# Altium PCB Second_PCB.PcbDoc
Units mm, origin at the board's own origin, x right, y up, seen from the top; angles counter-clockwise.
Board outline 229.74 x 79.88 mm, 2 copper layers (Top Layer, Bottom Layer); 25 components, 20 nets, 77 pads, 0 vias.
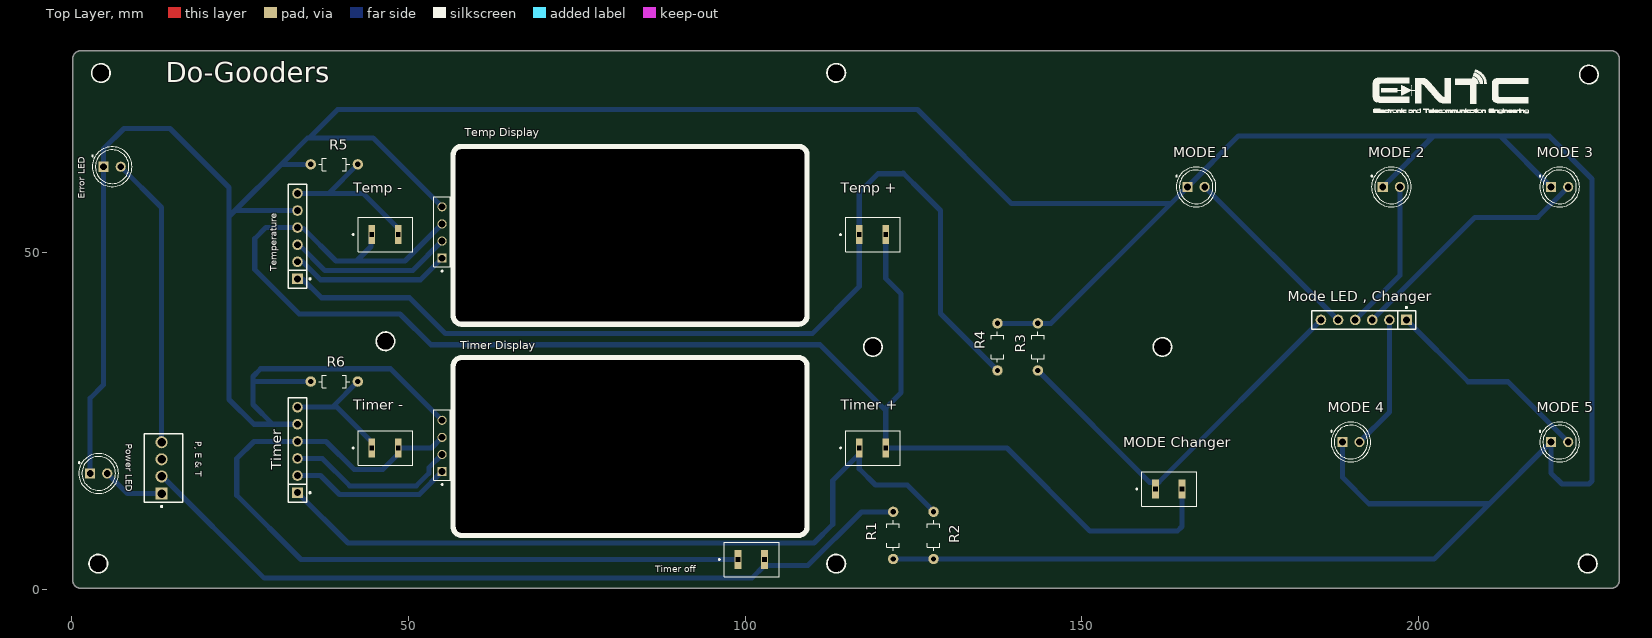
[diagram p0: Top Layer view]
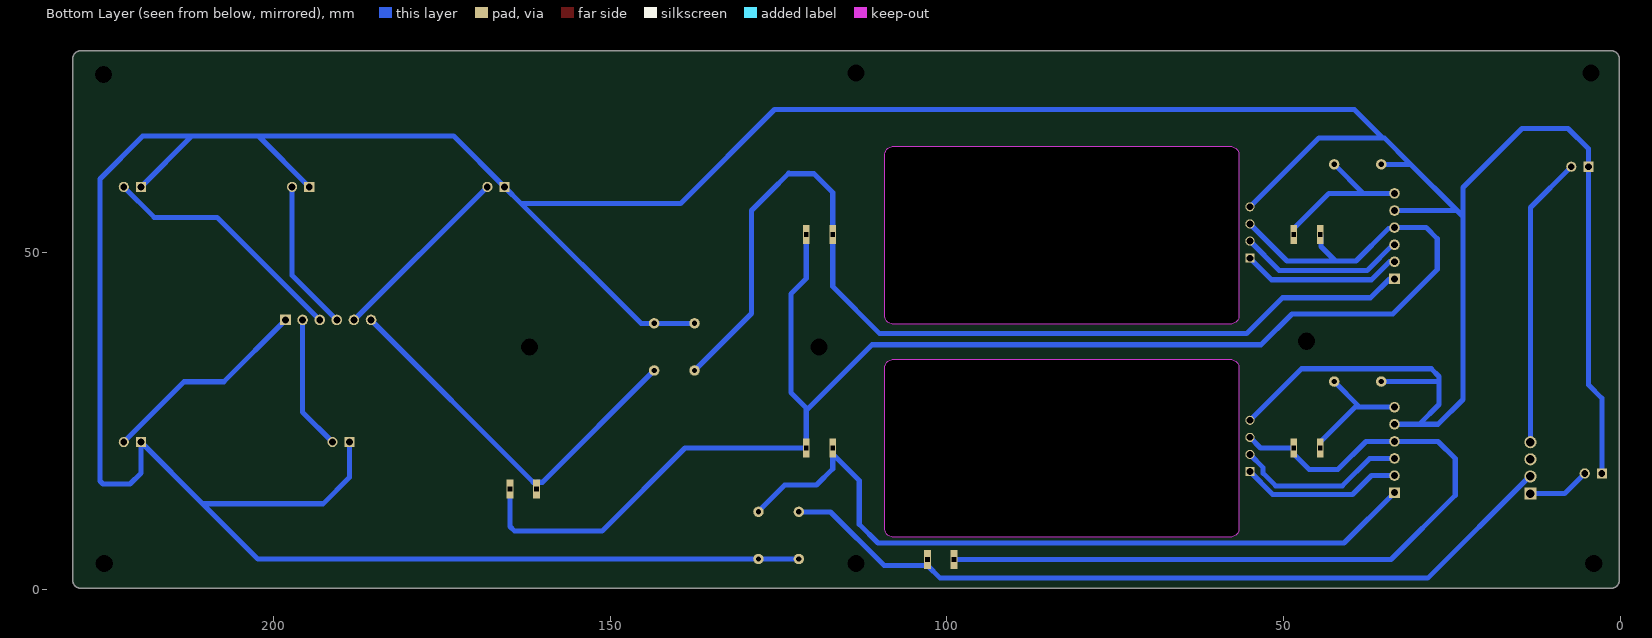
[diagram p1: Bottom Layer view, seen from below]
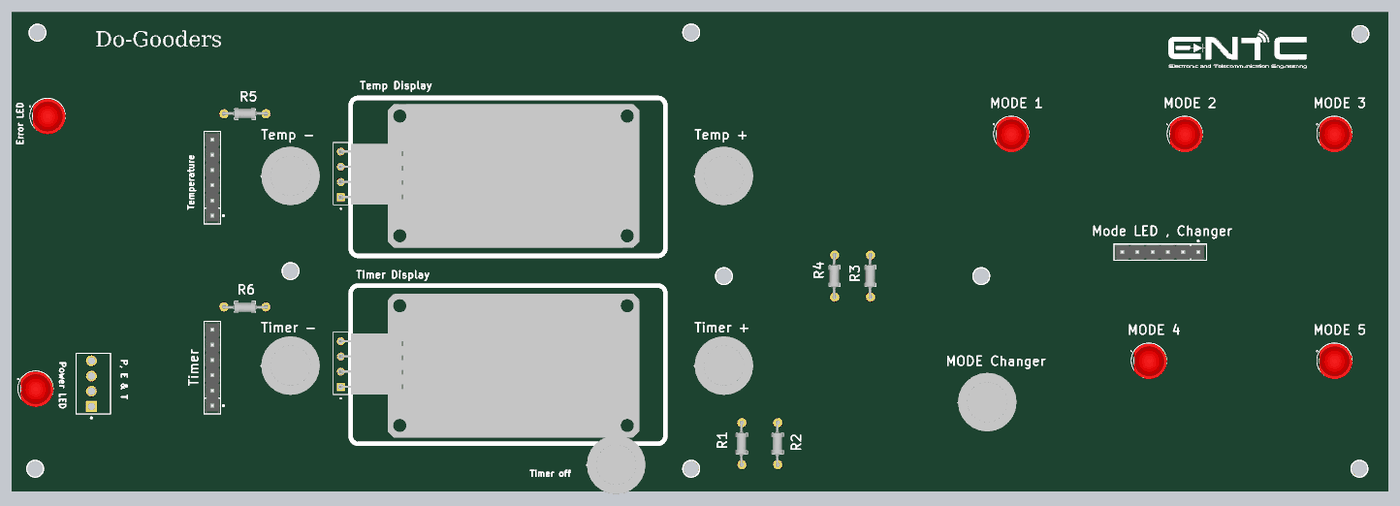
[diagram p2: 3D render of the assembled board from above, using the file's embedded part models]

## Layer stack, top to bottom
Top Solder: solder mask 0.0102, Solder Resist, Dk 3.5
Top Layer: signal copper 0.0356
Dielectric 1: dielectric 0.32, FR-4, Dk 4.8
Bottom Layer: signal copper 0.0356
Bottom Solder: solder mask 0.0102, Solder Resist, Dk 3.5

## Board outline
0.127,1.397 0.127,78.74 cw(c1.397,78.74) 1.397,80.01 228.6,80.01 cw(c228.6,78.74) 229.87,78.74 229.87,1.397 cw(c228.6,1.397) 228.6,0.127 1.397,0.127 cw(c1.397,1.397)
cut-out: 56.642,9.017 ccw(c57.912,9.017) 57.912,7.747 107.95,7.747 ccw(c107.95,9.017) 109.22,9.017 109.22,32.893 ccw(c107.95,32.893) 107.95,34.163 57.912,34.163 ccw(c57.912,32.893) 56.642,32.893
cut-out: 56.642,40.64 ccw(c57.912,40.64) 57.912,39.37 107.95,39.37 ccw(c107.95,40.64) 109.22,40.64 109.22,64.516 ccw(c107.95,64.516) 107.95,65.786 57.912,65.786 ccw(c57.912,64.516) 56.642,64.516

## Design rules (kind name [scope] priority, off if disabled: settings)
Clearance [All] p1: gap=0.254 ignorepadtopadclearanceinfootprint=FALSE except(0: Arc-Hole Track-Hole SMDPad-Hole THPad-Hole Via-Hole Fill-Hole Poly-Hole Region-Hole Text-Hole)
PolygonConnect [All] p1: connectstyle=Relief reliefconductorwidth=0.254 reliefentries=4 polygonreliefangle="90 Angle" airgapwidth=0.254
RoutingVias [All] p1: holewidth=0.711 width=1.27 viastyle="Through Hole" minholewidth=0.711 minwidth=1.27 maxholewidth=0.711 maxwidth=1.27
SolderMaskExpansion [All] p1: expansion=0.102 istentingtop=FALSE
Width [All] p1: maxlimit=0.762 minlimit=0.762 preferedwidth=0.762 minimp=50.000000 maximp=50.000000 favimp=50.000000
30 further rules are at their usual default settings.

## Components (designator, comment, footprint, x,y, rotation, side; value= is the part's Value field where it differs from the comment)
"Error LED" "WP7113SEC/J3" LED_WP7113SEC/J3 6,62.77 r0 top
"MODE 1" "WP7113SEC/J3" LED_WP7113SEC/J3 167,59.77 r0 top
"MODE 2" "WP7113SEC/J3" LED_WP7113SEC/J3 196,59.77 r0 top
"MODE 3" "WP7113SEC/J3" LED_WP7113SEC/J3 221,59.77 r0 top
"MODE 4" "WP7113SEC/J3" LED_WP7113SEC/J3 190,21.87 r0 top
"MODE 5" "WP7113SEC/J3" LED_WP7113SEC/J3 221,21.87 r0 top
"MODE Changer" "800AWSP9M2QE" SW_800AWSP9M2QE 163,14.89 r0 top
"Mode LED , Changer" "22-28-4060" FP-22-28-4060-MFG 191.897,40.005 r180 top
"P, E & T" "640456-4" TECO-640456-4 13.335,18.034 r270 top (schematic designator "Power, Error & Timer off")
"Power LED" "WP7113SEC/J3" LED_WP7113SEC/J3 4,17.21 r0 top
R1 "1623928-4" RESAD700W45L350D185 122,8 r90 top (schematic designator "Timer Off R")
R2 "1623928-4" RESAD700W45L350D185 128,8 r90 top (schematic designator "Timer + R")
R3 "1623928-4" RESAD700W45L350D185 143.5,36 r90 top (schematic designator "MODE R")
R4 "1623928-4" RESAD700W45L350D185 137.5,36 r90 top (schematic designator "Temp + R")
R5 "1623928-4" RESAD700W45L350D185 38.989,63.119 r0 top (schematic designator "Temp - R")
R6 "1623928-4" RESAD700W45L350D185 38.989,30.861 r180 top (schematic designator "Timer - R")
"Temp +" "800AWSP9M2QE" SW_800AWSP9M2QE 119,52.69 r0 top
"Temp -" "800AWSP9M2QE" SW_800AWSP9M2QE 46.6,52.69 r0 top
"Temp Display" "2-826926-0" TE_2-826926-0 55,49.187 r90 top
Temperature "22-28-4060" FP-22-28-4060-MFG 33.528,52.451 r90 top
Timer "22-28-4060" FP-22-28-4060-MFG 33.528,20.701 r90 top
"Timer +" "800AWSP9M2QE" SW_800AWSP9M2QE 119,20.99 r0 top
"Timer -" "800AWSP9M2QE" SW_800AWSP9M2QE 46.6,20.99 r0 top
"Timer Display" "2-826926-0" TE_2-826926-0 55,17.487 r90 top
"Timer off" "800AWSP9M2QE" SW_800AWSP9M2QE 101,4.43 r0 top

## Footprints (in the part's own frame and the unit in brackets; to place one, negate y for a bottom-side part, rotate by r counter-clockwise, add the part's x,y. Pads: shape width x height; smd on the part's side, far side on the other; paste and mask are expansions set on the pad)
FP-22-28-4060-MFG [mm]
  rect 1.57x1.57 hole 1.02 paste-1000 mask+0: 1(-6.35,0)
  round 1.57 hole 1.02 paste-1000 mask+0: 2(-3.81,0) 3(-1.27,0) 4(1.27,0) 5(3.81,0) 6(6.35,0)
  silkscreen extent -7.75,-1.97 7.75,1.37, body extent -7.85,-1.47 7.85,1.47, height 0.25
LED_WP7113SEC/J3 [mm]
  round 1.508 hole 1: A(1.27,0)
  rect 1.508x1.508 hole 1: C(-1.27,0)
  silkscreen extent -3.03,-2.95 2.95,2.95, body extent -2.46,-3.05 2.97,2.85, height 19.76
RESAD700W45L350D185 [mm]
  round 1.558 hole 0.8: 1(-3.5,0) 2(3.5,0)
  silkscreen extent -2.29,-0.92 2.29,0.92, body extent -3.75,-0.92 3.75,1.08, height 0.99
SW_800AWSP9M2QE [mil]
  rect 40x110 hole 25 square: 1(-80,0) 3(75,0)
  silkscreen extent -193,-100 160,100, body extent -193,-191 193,195, height 815
TE_2-826926-0 [mm]
  rect 1.35x1.35 hole 1: 1(0,0)
  round 1.35 hole 1: 2(2.54,0) 3(5.08,0) 4(7.62,0)
  silkscreen extent -2.02,-1.25 9.14,1.25, body extent -8.44,-49.85 15.56,0.25, height 7.56
TECO-640456-4 [mm] "Through Hole, 4-Leads, Body 10.16x5.72mm, Pitch 2.54mm"
  rect 1.8x1.8 hole 1.27 paste+0: 1(3.81,0)
  round 1.8 hole 1.27 paste+0: 2(1.27,0) 3(-1.27,0) 4(-3.81,0)
  silkscreen extent -5.08,-2.54 5.86,3.18, body extent -5.08,-2.54 5.08,3.18, height 10.03

## Part data
"Error LED" "MODE 1" "MODE 2" "MODE 3" "MODE 4" "MODE 5" "Power LED": "Red 625nm LED Indication - Discrete 2.2V Radial", Package="Radial Kingbright", Availability=Unavailable, MF=Kingbright, MP=WP7113SEC/J3, Price=None, SnapEDA_Link=https://www.snapeda.com/parts/WP7113SEC/J3/Kingbright/view-part/826989/?ref=snap
"MODE Changer" "Temp +" "Temp -" "Timer +" "Timer -" "Timer off": "Pushbutton Switch SPST-NO Standard Through Hole", Package=None, Availability="In Stock", Check_prices=https://www.snapeda.com/parts/800AWSP9M2QE/E-Switch/view-part/?ref=eda, MF=E-Switch, MP=800AWSP9M2QE, Price=None, Purchase-URL=https://pricing.snapeda.com/search/part/800AWSP9M2QE/?ref=eda, SnapEDA_Link=https://www.snapeda.com/parts/800AWSP9M2QE/E-Switch/view-part/?ref=snap
"Mode LED , Changer" Temperature Timer: library part CMP-04776-000763-1, "CONN HEADER VERT 6POS 2.54MM", Color=Black, Contact Resistance=20mR, Current Rating=4A, Max Operating Temperature=75°C, Max Voltage Rating (AC)=250V, Max Voltage Rating (DC)=250.25kV, Min Operating Temperature=0°C, Package Quantity=1, Connector Type="Male Pin", Contact Material=Brass, Contact Mating Length=0.24inch, Contact Plating=Tin, Contact Type="Male Pin", Depth=2.49mm, Gender=Male, Housing Color=Black, Housing Material=Thermoplastic, Length=15.24mm, Mount="Through Hole", Number of Contacts=6, Number of Positions=6, Number of Rows=1, Orientation=Straight, Packaging=Bulk, Pitch=2.54mm, RoHS Compliant=Yes, Series="KK® 42375", Termination=Solder, Voltage Rating=250V
"P, E & T": library part CMP-2000-05419-1, "Male Header, Pitch 2.54 mm, 1 x 4 Position, Height 10.03 mm, Tail Length 3.56 mm, RoHS, Bulk", Color=White, Current, Rating="5 /  / A", Flammability Rating=UL94V-0, Manufacturer="TE Connectivity", Temperature, Operating="-55to+105 /  / degC", Voltage, Rating="250 /  / V", Agency Approvals=CSA,UL, Angle=Straight, Brand/Series=MTA-100Series, Color, Housing=White, Connector Type=MTA-100, Contact Centerline Spacing="0.100 /  / in.", Contact Mating Area Plating=Tin, Contact Plating=Tin, Contact Shape=Square, Contact Termination Area Plating=Tin, Datasheet URL=https://datasheet.ciiva.com/16286/eng-ds-82056-mta-0608-16286228.pdf, Datasheet Version=Dec-14, Length, Overall="0.4 /  / \"", Length, Pin="0.14 /  / \"", Length, Terminal Post="0.14 /  / in.", Manufacturer URL=http://www.te.com/, Material, Contact=CopperAlloy, Material, Housing=Polyester, Mount Angle=Vertical, Mounting Hole Size="0.04 /  / \"", Mounting Type=PCMount, Number of Contacts=4, Number of Positions=4, Number of Rows=1, Pin Spacing="0.1 /  / \"", Primary Type=InterconnectSystem, Size, Post="0.025 /  / in.", Special Features=Pinstrip, Standards=RoHSCompliant,ELVCompliant,UL94V-0, Termination=Solder, Type=PCBPlug
R1 R2 R3 R4 R5 R6: "CFR16 5% 10K", Package=None, Availability=Unavailable, MP=1623928-4, Price=None
"Temp Display" "Timer Display": "20P AMPMODU II PIN HDR", Package=None, Availability=Warning, Centerline_Pitch="2.54 mm[.1 in]", EU_RoHS_Compliance=Compliant, MF="TE Connectivity", MP=2-826926-0, Number_of_Positions=20, Price=None, Product_Type=Connector, SnapEDA_Link=https://www.snapeda.com/parts/2-826926-0/TE%20Connectivity%20AMP%20Connectors/view-part/1399270/?ref=snap

## Free pads (board coordinates)
  round 1.524 hole 2.54: 2(3.937,3.81) 2(4.318,76.685) 2(46.6,36.84) 2(113.538,3.81) 2(113.538,76.685) 2(119,36) 2(162,36) 2(225.171,3.81) 2(225.298,76.454)

## Nets (pads, with @x,y where several pads share a name; then routed paths per layer and width w, separated by ;. In a path a pad name is that pad's centre, name@x,y a point inside that pad or via, vN(x,y) a via of type N, cw(c..) or ccw(c..) an arc to the next point about the centre after c; other vN are vias at no path point)
GND: "Error LED.C" "MODE 1.C" "MODE 2.C" "MODE 3.C" "MODE 4.C" "MODE 5.C" "Power LED.C" "Temp Display.4" "Timer Display.4" R1.1 R2.1 R3.2 R4.2 R5.1 R6.2 Temperature.5 Timer.5 | length 668
  Bottom Layer w0.762: 2.73,17.21 2.73,28.384 4.73,30.384 4.73,62.77 4.73,65.436 7.747,68.453 14.605,68.453 23.368,59.69 23.368,55.372 ; Timer.5 29.845,24.511 ; Temperature.5 24.257,56.261 ; R6.2 27.051,30.861 26.924,30.734 ; R5.1 31.242,63.119 31.178,63.182 ; 55,25.107 47.341,32.766 28.067,32.766 26.924,31.623 26.924,30.734 ; 55,56.807 44.751,67.056 35.306,67.056 ; R1.1 R2.1 202.36,4.5 210.56,12.7 ; R4.2 R3.2 145.46,39.5 163.237,57.277 ; 188.73,21.87 188.73,16.629 192.659,12.7 210.56,12.7 ; 194.73,59.77 202.27,67.31 ; 219.73,59.77 212.19,67.31 ; 23.368,55.372 24.257,56.261 ; 23.368,55.372 23.368,28.194 27.051,24.511 29.845,24.511 ; 24.257,56.261 31.178,63.182 ; 26.924,30.734 26.924,27.432 29.845,24.511 ; 31.178,63.182 35.052,67.056 35.306,67.056 ; 35.306,67.056 39.497,71.247 125.603,71.247 139.573,57.277 163.237,57.277 ; 163.237,57.277 165.73,59.77 173.27,67.31 202.27,67.31 ; 202.27,67.31 212.19,67.31 ; 210.56,12.7 219.73,21.87 219.73,17.252 221.361,15.621 225.36,15.621 225.806,16.067 225.806,60.96 219.456,67.31 212.19,67.31
"NetError LED_A": "Error LED.A" "P, E & T.4" | length 43.4
  Bottom Layer w0.762: 7.27,62.77 13.335,56.705 13.335,21.844
"NetMODE 1_A": "MODE 1.A" "Mode LED , Changer.5" | length 28
  Bottom Layer w0.762: 168.27,59.77 168.296,59.77 188.061,40.005 188.087,40.005
"NetMODE 2_A": "MODE 2.A" "Mode LED , Changer.4" | length 22.5
  Bottom Layer w0.762: 190.627,40.005 197.27,46.648 197.27,59.77
"NetMODE 3_A": "MODE 3.A" "Mode LED , Changer.3" | length 37.3
  Bottom Layer w0.762: 193.167,40.005 208.407,55.245 217.745,55.245 222.27,59.77
"NetMODE 4_A": "MODE 4.A" "Mode LED , Changer.2" | length 20
  Bottom Layer w0.762: 191.27,21.87 195.707,26.307 195.707,40.005
"NetMODE 5_A": "MODE 5.A" "Mode LED , Changer.1" | length 31.5
  Bottom Layer w0.762: 198.247,40.005 207.428,30.824 213.316,30.824 222.27,21.87
"NetMODE Changer_1": "MODE Changer.1" "Mode LED , Changer.6" R3.1 | length 59.4
  Bottom Layer w0.762: R3.1 160.094,15.906 160.841,15.906 160.968,15.779 160.968,14.89 ; 161.448,15.906 185.547,40.005
"NetPower LED_A": "P, E & T.1" "Power LED.A" | length 9.3
  Bottom Layer w0.762: 5.27,17.21 8.256,14.224 13.335,14.224
"NetPower, Error & Timer off_2": "P, E & T.2" "Timer off.3" R1.2 | length 119.9
  Bottom Layer w0.762: 13.335,16.764 13.493,16.764 28.606,1.651 101.015,1.651 102.905,3.541 ; 102.905,4.43 102.905,3.541 ; R1.2 117.291,11.5 109.332,3.541 102.905,3.541
"NetTemp + R_1": "Temp +.1" R4.1 Temperature.1 | length 146.5
  Bottom Layer w0.762: Temperature.1 34.29,46.101 37.084,43.307 50.165,43.307 55.499,37.973 109.982,37.973 116.968,44.959 116.968,52.69 116.968,58.929 119.761,61.722 123.444,61.722 123.509,61.787 126.365,58.932 126.365,58.928 129.032,56.261 129.032,40.968 R4.1
"NetTemp - R_2": "Temp -.3" R5.2 Temperature.6 | length 24.1
  Bottom Layer w0.762: Temperature.6 38.171,58.801 ; R5.2 38.171,58.801 ; 48.505,52.69 48.505,53.579 43.283,58.801 38.171,58.801
"NetTemp Display_1": "Temp Display.1" Temperature.2 | length 23.9
  Bottom Layer w0.762: Temperature.2 34.29,48.641 36.957,45.974 51.787,45.974 55,49.187
"NetTemp Display_2": "Temp Display.2" Temperature.3 | length 24.8
  Bottom Layer w0.762: Temperature.3@33.655,51.308 37.592,47.371 50.644,47.371 55,51.727
"NetTimer + R_2": "Timer +.1" R2.2 Timer.1 | length 112.2
  Bottom Layer w0.762: Timer.1 41.021,6.858 110.236,6.858 113.03,9.652 113.03,16.163 116.968,20.101 ; 116.968,20.99 116.968,20.101 ; R2.2@127.717,11.882 124.105,15.494 119.38,15.494 116.968,17.906 116.968,20.101
"NetTimer - R_1": "Timer -.1" R6.1 Timer.6 | length 19.5
  Bottom Layer w0.762: Timer.6 38.679,27.051 ; R6.1 38.679,27.051 ; 44.568,20.99 44.568,21.879 39.396,27.051 38.679,27.051
"NetTimer Display_1": "Timer Display.1" Timer.2 | length 24
  Bottom Layer w0.762: Timer.2 36.957,16.891 39.751,14.097 51.61,14.097 55,17.487
"NetTimer Display_2": "Timer Display.2" Timer.3 | length 25.6
  Bottom Layer w0.762: Timer.3 37.211,19.431 41.275,15.367 51.181,15.367 53.034,17.22 53.034,18.061 55,20.027
Vcc: "MODE Changer.3" "Temp +.3" "Temp -.1" "Temp Display.3" "Timer +.3" Temperature.4 | length 233.2
  Bottom Layer w0.762: 44.568,52.69 44.441,52.563 44.441,50.918 42.291,48.768 ; 55,54.267 49.501,48.768 42.291,48.768 ; 120.905,52.69 120.905,46.153 123.19,43.868 123.19,29.21 120.905,26.925 120.905,26.542 ; 164.905,14.89 164.905,9.33 164.211,8.636 151.257,8.636 138.903,20.99 120.905,20.99 120.905,26.542 ; 42.291,48.768 39.243,48.768 34.445,53.566 33.683,53.566 Temperature.4 28.829,53.721 27.178,52.07 27.178,47.498 33.782,40.894 48.768,40.894 53.34,36.322 111.125,36.322 120.905,26.542
Vcc1: "Timer -.3" "Timer Display.3" "Timer off.1" Timer.4 | length 119.7
  Bottom Layer w0.762: 55,22.567 53.423,20.99 48.505,20.99 48.505,20.101 46.184,17.78 41.956,17.78 37.765,21.971 Timer.4 27.051,21.971 24.511,19.431 24.511,13.97 34.051,4.43 98.968,4.43
pads on no net: "P, E & T.3"

## Silkscreen, mask and mechanical layers (free items; w line width, h text height)
Top Overlay:
  drawing of 78 lines, arcs and shapes, not listed
  text "Do-Gooders" at 13.97,74.347 h5.08
Board Shape:
  the board outline again, w0.254